# Altium PCB Eurocard VME 3U (3.937 x 8.660 inches).PCBDOC (part 2 of 2)
Units mm, origin at the board's own origin, x right, y up, seen from the top; angles counter-clockwise.
Board outline 219.96 x 100 mm, 2 copper layers (Component Side, Bottom Layer), stack 0.325 mm thick; 72 components, 87 nets, 462 pads, 228 vias.
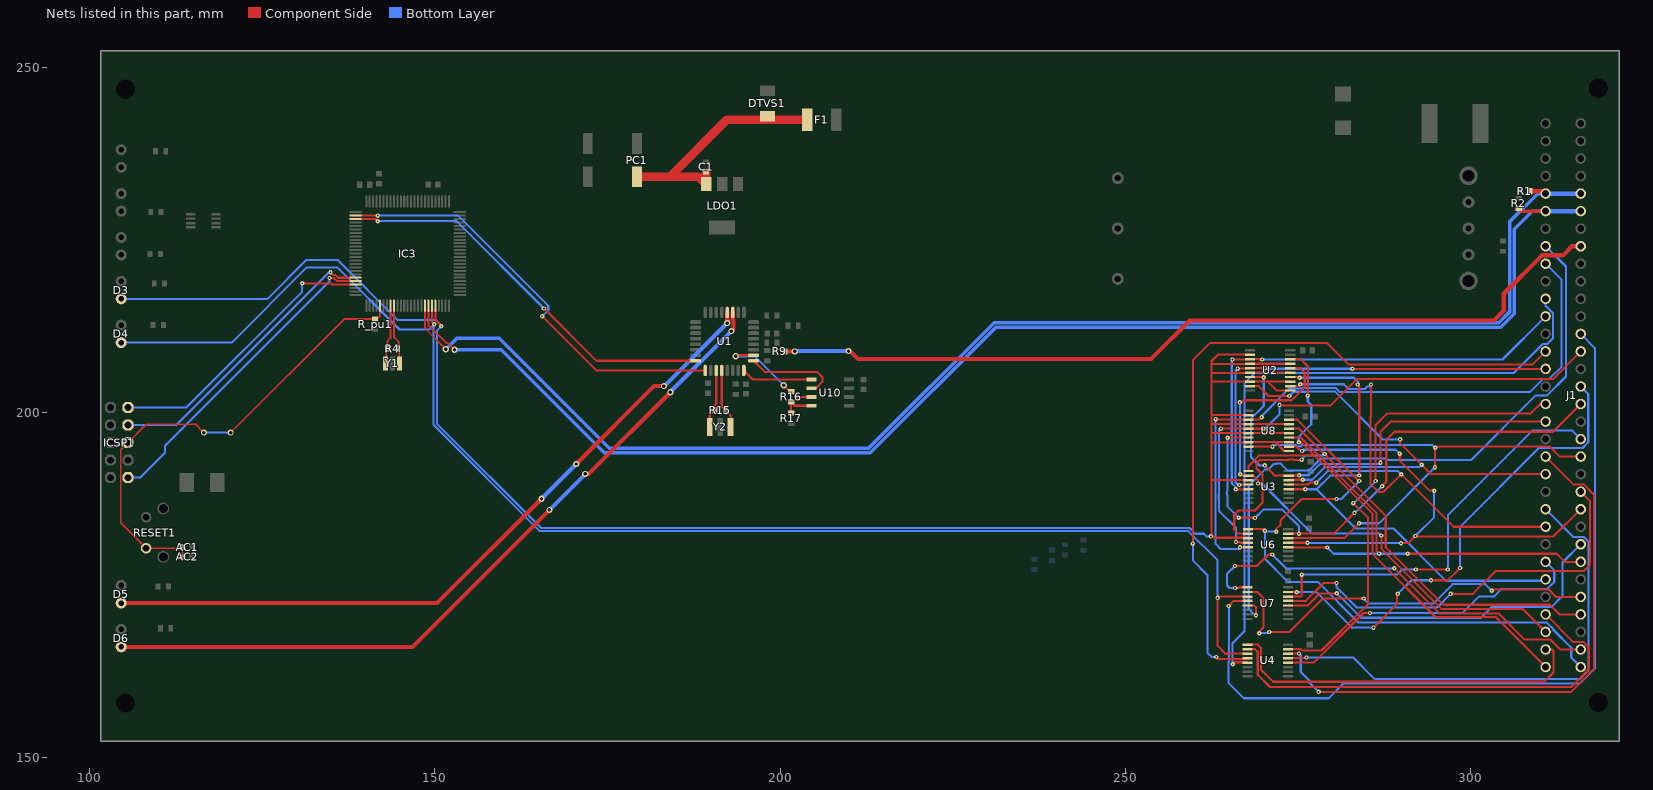
[diagram p2: the nets of this part, all layers, seen from the top]

## Via types
v1: diameter 0.635, hole 0.254, Component Side to Bottom Layer, 154 vias
v2: diameter 0.9, hole 0.5, Component Side to Bottom Layer, 48 vias
v3: diameter 1.016, hole 0.457, Component Side to Bottom Layer, 10 vias
v4: diameter 0.914/0.914 (per signal layer), hole 0.406, Component Side to Bottom Layer, 10 vias
v5: diameter 1.778, hole 0.9, Component Side to Bottom Layer, 3 vias
v6: diameter 1.27, hole 0.711, Component Side to Bottom Layer, 2 vias
v7: diameter 1.27, hole 0.635, Component Side to Bottom Layer, 1 vias

## Nets (pads, with @x,y where several pads share a name; then routed paths per layer and width w, separated by ;. In a path a pad name is that pad's centre, name@x,y a point inside that pad or via, vN(x,y) a via of type N, cw(c..) or ccw(c..) an arc to the next point about the centre after c; other vN are vias at no path point) (continued)
NetR15_1: R15.1 U1.28 Y2.3 | length 8.7
  Component Side w0.305: U1.28@191.548,206.087 191.548,200.845 R15.1@192.063,200.33 192.813,199.58 Y2.3@192.813,197.891
NetR15_2: R15.2 U1.27 Y2.1 | length 8.6
  Component Side w0.305: Y2.1@189.813,197.891 189.813,199.58 R15.2@190.563,200.33 190.563,201.078 190.748,201.263 U1.27@190.748,206.087
NetR16_1: R16.1 R17.2 U10.4 | length 4.7
  Component Side w0.305: R17.2@201.6,199.911 201.6,201.485 202.12,200.965 U10.4@204.546,200.965
NetR16_2: R16.2 U1.2 U10.3 | length 15.9
  Component Side w0.305: v2(193.573,208.128) 193.732,208.287 U1.2@196.148,208.287 ; v2(200.533,203.937) R16.2@201.459,203.01 ; R16.2@201.625,203.01 202.401,202.235 U10.3@204.546,202.235
  Bottom Layer w0.305: v2(193.573,208.128) 196.342,208.128 v2(200.533,203.937)
NetU1_1: U1.1 U10.2 | length 13.6
  Component Side w0.305: U1.1@196.148,207.487 197.767,205.867 205.384,205.867 206.121,205.13 206.121,204.419 205.207,203.505 U10.2@204.546,203.505
NetU1_32: U1.32 U10.1 | length 10.3
  Component Side w0.305: U1.32@194.748,206.087 196.06,204.775 U10.1@204.546,204.775
PB1: IC3.20 ICSP1.7 | length 41.9
  Component Side w0.305: v1@134.925,220.243 135.232,219.936 135.545,219.936 135.969,219.512 IC3.20@138.05,219.512
  Bottom Layer w0.305: ICSP1.7@105.537,198.171 112.534,198.171 134.658,220.294 v1(134.874,220.294)
PB2: IC3.21 ICSP1.1 | length 45.6
  Component Side w0.305: v1(134.722,219.481) 135.357,219.481 135.826,219.012 IC3.21@138.05,219.012
  Bottom Layer w0.305: ICSP1.1@105.537,190.551 107.264,190.551 110.896,194.183 110.896,195.199 134.722,219.024 v1(134.722,219.481)
PB3: IC3.22 ICSP1.9 | length 40.8
  Component Side w0.305: v1(130.759,218.694) 134.976,218.694 135.158,218.512 IC3.22@138.05,218.512
  Bottom Layer w0.305: ICSP1.9@105.537,200.711 113.995,200.711 130.759,217.475 v1(130.759,218.694)
PE0: IC3.2 U1.25 | length 62.5
  Component Side w0.305: IC3.2@138.05,228.512 v1(141.72,228.512) ; v1(165.519,213.919) 173.352,206.087 U1.25@189.148,206.087
  Bottom Layer w0.305: v1(141.72,228.512) 153.351,228.512 166.406,215.458 166.406,214.805 v1(165.519,213.919)
PE1: IC3.3 U1.24 | length 58.2
  Component Side w0.305: IC3.3@138.05,228.012 141.344,228.012 141.464,227.892 141.482,227.892 141.663,227.711 v1(141.707,227.711) ; v1(165.786,215.062) 165.811,215.062 173.386,207.487 U1.24@187.748,207.487
  Bottom Layer w0.305: v1(141.707,227.711) 153.137,227.711 v1(165.786,215.062)
RESET: AC1.1 AC2.1 IC3.30 ICSP1.5 R_pu1.1 RESET1.2 | length 69.5
  Component Side w0.254: AC1.1@113.28,180.325 RESET1.2@108.153,180.325 104.473,184.005 104.473,194.566 ICSP1.5@105.537,195.631 108.179,198.272 115.341,198.272 v2(116.532,197.082) ; AC2.1@113.448,179.248 AC1.1@113.448,180.492 ; v2@120.599,197.282 136.843,213.526 R_pu1.1@141.326,213.526 141.439,213.639 141.732,213.639 142.05,213.957 IC3.30@142.05,215.012
  Bottom Layer w0.254: v2(116.532,197.082) v2(120.399,197.082)
RX0: D6.1 U1.11 | length 110.3
  Component Side w0.61: D6.1@104.546,166.04 146.736,166.04 v2(166.573,185.877) ; v2(171.78,191.084) 172.263,191.084 v2(184.099,202.921) ; v2(192.938,211.785) 193.253,212.099 193.253,213.322 193.148,213.427 U1.11@193.148,214.487
  Bottom Layer w0.61: v2(166.573,185.877) v2(171.78,191.084) ; v2@184,202.847 v2(192.938,211.785)
RX1: D4.1 IC3.45 U4.3 U7.3 | length 214.1
  Component Side w0.305: IC3.45@149.55,215.012 149.55,213.111 v1@149.911,212.75 ; U4.3@267.716,165.049 267.706,165.059 264.919,165.059 264.909,165.049 264.516,165.049 263.373,166.192 v1(263.373,173.126) 263.576,173.33 U7.3@267.716,173.33
  Bottom Layer w0.305: D4.1@104.546,210.109 120.548,210.109 131.445,221.005 135.865,221.005 144.856,212.014 149.149,212.014 v1@149.812,212.677 ; v1(149.885,212.75) v1@149.812,212.677 ; v1(263.373,173.126) 263.373,178.562 259.131,182.804 165.193,182.804 149.812,198.186 v1@149.812,212.677
RXA1: J1.62 U4.1 | length 53.3
  Component Side w0.305: U4.1@267.716,166.37 269.189,166.37 269.646,165.913 269.646,162.763 271.424,160.985 310.693,160.985 312.039,162.331 312.039,165.43 311.81,165.659 J1.62@310.896,165.659
RXA2: J1.60 U4.2 | length 66.1
  Component Side w0.305: U4.2@267.716,165.71 268.783,165.71 269.192,165.301 269.192,161.999 270.967,160.223 314.586,160.223 317.17,162.807 317.17,165.97 316.417,166.723 314.912,166.723 J1.60@310.896,170.739
RXA3: J1.57 U4.12 | length 46.9
  Component Side w0.305: U4.12@273.558,163.754 277.317,163.754 284.505,170.942 v1(285.445,170.942)
  Bottom Layer w0.305: v1(285.445,170.942) 298.806,170.942 298.831,170.917 301.269,173.355 303.454,173.355 304.546,174.447 311.15,174.447 312.141,175.438 312.141,177.114 J1.57@310.896,178.359
RXA4: J1.54 U4.13 | length 72.2
  Component Side w0.305: U4.13@273.558,164.414 276.174,164.414 v1(276.25,164.49)
  Bottom Layer w0.305: v1(276.25,164.49) 283.032,164.49 286.156,161.366 315.849,161.366 317.119,162.636 317.119,181.261 316.417,181.963 314.912,181.963 J1.54@310.896,185.979
RXA5: J1.51 U4.14 | length 84.2
  Component Side w0.305: U4.14@273.558,165.049 273.583,165.075 v1(275.158,165.075) ; v1(278.003,159.512) 314.579,159.512 317.881,162.814 317.881,188.119 316.417,189.583 314.912,189.583 J1.51@310.896,193.599
  Bottom Layer w0.305: v1(275.158,165.075) 275.412,164.821 275.412,162.408 276.682,161.138 276.682,160.833 v1(278.003,159.512)
RXA6: J1.48 U4.15 | length 68.6
  Component Side w0.305: U4.15@273.558,165.71 275.438,165.71 275.641,165.506 278.427,165.506 284.317,171.397 284.376,171.397 285.166,172.187 285.166,172.783 285.176,172.793 285.176,184.724 v1(283.032,186.868) ; v1(286.258,190.068) 286.258,198.196 286.271,198.183 287.96,199.873 308.762,199.873 310.109,201.219 J1.48@310.896,201.219
  Bottom Layer w0.305: v1(283.032,186.868) 283.108,186.868 v1@286.283,190.043
RXA7: J1.45 U4.4 | length 103.7
  Component Side w0.305: v1(259.791,181) 259.791,207.543 262.329,210.081 279.199,210.081 282.321,206.959 309.016,206.959 J1.45@310.896,208.839 ; v1(263.171,164.569) 263.453,164.287 267.538,164.287 267.691,164.44 U4.4@267.716,164.414
  Bottom Layer w0.305: v1(259.791,181) 259.791,178.562 261.899,176.454 261.899,165.176 262.507,164.569 v1(263.171,164.569)
RXA8: J1.42 U4.5 | length 97.3
  Component Side w0.305: v1(265.557,163.525) 265.836,163.805 267.665,163.805 U4.5@267.716,163.754
  Bottom Layer w0.305: v1(265.557,163.525) 265.557,166.599 267.269,168.311 267.269,191.29 267.259,191.3 267.259,204.241 268.717,205.699 270.31,205.699 270.32,205.689 306.241,205.689 310.455,209.903 311.122,209.903 311.96,210.741 311.96,214.36 310.896,215.424 J1.42@310.896,216.459
RXB1: J1.30 U7.1 | length 63
  Component Side w0.305: v1(265.887,177.749) 269.062,177.749 270.739,179.426 v1(271.297,179.426) ; v1(265.913,174.574) 266.421,174.574 266.522,174.676 267.691,174.676 U7.1@267.716,174.65 ; v1(288.95,177.444) 295.504,170.891 304.063,170.891 307.82,167.134 311.529,167.134 313.004,165.659 J1.30@315.976,165.659
  Bottom Layer w0.305: v1(265.887,177.749) 264.744,176.606 264.744,174.93 265.1,174.574 v1(265.913,174.574) ; v1(271.297,179.426) 273.327,177.396 288.902,177.396 v1(288.95,177.444)
RXB2: J1.27 U7.2 | length 59
  Component Side w0.305: U7.2@267.716,173.99 269.113,173.99 270.027,173.076 270.027,168.88 269.392,168.245 v1(269.392,168.021) ; v1(270.866,168.199) 273.736,168.199 278.587,173.05 v1(284.556,173.05) ; v1(303.073,174.168) 303.251,174.346 310.453,174.346 310.455,174.343 311.337,174.343 312.401,173.279 J1.27@315.976,173.279
  Bottom Layer w0.305: v1(269.392,168.021) 270.688,168.021 v1(270.866,168.199) ; v1@284.556,172.999 285.217,172.339 294.665,172.339 297.444,175.118 302.123,175.118 v1(303.073,174.168)
RXB3: J1.24 U7.12 | length 51.8
  Component Side w0.305: U7.12@273.558,172.034 276.454,172.034 278.206,173.787 v1(280.645,173.787)
  Bottom Layer w0.305: v1(280.645,173.787) 284.175,170.256 301.523,170.256 303.124,171.856 311.76,171.856 313.334,173.431 313.334,178.257 J1.24@315.976,180.899
RXB4: J1.21 U7.13 | length 60.4
  Component Side w0.305: U7.13@273.558,172.695 276.149,172.695 278.74,175.285 v1(280.594,175.285) ; v1(297.129,173.711) 300.355,173.711 303.682,177.038 316.433,177.038 317.348,177.952 317.348,187.147 J1.21@315.976,188.519
  Bottom Layer w0.305: v1(280.594,175.285) 280.594,174.701 280.888,174.407 280.901,174.407 281.264,174.044 281.264,174.031 283.566,171.729 295.148,171.729 v1(297.129,173.711)
RXB5: J1.18 U7.14 | length 59.2
  Component Side w0.305: U7.14@273.558,173.33 275.387,173.33 275.565,173.507 v1(275.565,176.505) ; v1(292.075,177.241) v1(296.723,177.241)
  Bottom Layer w0.305: v1(275.565,176.505) 289.382,176.505 290.119,177.241 v1(292.075,177.241) ; v1(296.723,177.241) 296.723,185.115 308.966,197.358 314.757,197.358 J1.18@315.976,196.139
RXB6: J1.15 U7.15 | length 69.5
  Component Side w0.305: U7.15@273.558,173.99 273.583,173.965 v1(274.828,173.965) ; v1(285.953,168.834) 289.382,172.263 v1@289.382,173.685 ; v1(294.284,175.692) 296.723,175.692 v1(298.501,177.47)
  Bottom Layer w0.305: v1(274.828,173.965) 277.724,173.965 282.88,168.808 282.905,168.834 v1(285.953,168.834) ; v1(289.484,173.711) 291.465,175.692 v1(294.284,175.692) ; v1(298.501,177.47) 298.501,183.439 309.905,194.843 316.23,194.843 317.068,195.682 317.068,202.667 J1.15@315.976,203.759
RXB7: J1.12 U7.4 | length 119.3
  Component Side w0.305: v1(264.998,171.958) 265.735,172.695 U7.4@267.716,172.695
  Bottom Layer w0.305: v1(264.998,171.958) 264.998,163.843 264.937,163.782 264.937,160.843 267.183,158.598 279.451,158.598 281.584,160.731 315.849,160.731 316.029,160.911 316.037,160.911 318.033,162.907 318.033,209.321 J1.12@315.976,211.379
RXB8: J1.39 U7.5 | length 95.3
  Component Side w0.305: U7.5@267.716,172.034 267.741,172.009 268.732,172.009 268.935,171.806 v1(268.935,170.612)
  Bottom Layer w0.305: v1@268.783,170.612 267.894,171.501 267.894,189.382 270.22,191.709 270.703,191.709 271.541,192.547 271.843,192.547 271.876,192.58 272.547,192.58 273.559,191.569 276.6,191.569 278.353,193.322 278.877,193.322 278.9,193.345 287.693,193.345 287.922,193.116 300.126,193.116 309.474,202.463 311.106,202.463 313.842,205.2 313.842,221.132 J1.39@310.896,224.079
SCL: IC3.43 J1.4 J1.36 R1.2 | length 204.3
  Component Side w0.254: IC3.43@148.55,215.012 148.55,212.155 v2(151.562,209.144)
  Component Side w0.635: R1.2@308.768,231.883 308.635,232.016 310.579,232.016 J1.36@310.896,231.699
  Bottom Layer w0.508: v2(151.562,209.144) 153.187,210.769 159.309,210.769 175.26,194.818 212.81,194.818 230.994,213.002 304.121,213.002 305.666,214.547 305.666,227.6 309.765,231.699 J1.36@310.896,231.699
  Bottom Layer w0.635: J1.36@310.896,231.699 J1.4@315.976,231.699
SDA: IC3.44 J1.5 J1.37 R2.2 | length 202.7
  Component Side w0.254: IC3.44@149.05,215.012 149.05,212.646 151.689,210.007 151.917,210.007 v2(152.832,209.093)
  Component Side w0.508: R2.2@306.984,229.526 307.352,229.159 J1.37@310.896,229.159
  Bottom Layer w0.508: v2(152.832,209.093) 159.614,209.093 174.549,194.158 213.081,194.158 231.267,212.344 304.394,212.344 306.324,214.274 306.324,226.543 308.94,229.159 J1.37@310.896,229.159
  Bottom Layer w0.635: J1.37@310.896,229.159 J1.5@315.976,229.159
TX0: D5.1 U1.12 | length 106.1
  Component Side w0.61: D5.1@104.546,172.39 150.317,172.39 v2(165.43,187.503) ; v2(170.459,192.532) 181.737,203.81 v2(183.159,203.81) ; v2(192.348,212.947) U1.12@192.348,214.487
  Bottom Layer w0.61: v2(165.43,187.503) v2(170.459,192.532) ; v2@183.236,203.835 v2(192.348,212.947)
TX1: D3.1 IC3.46 U2.2 U2.4 U2.6 U2.8 U2.11 U2.13 U2.15 U2.17 U3.3 U6.3 U8.2 U8.4 U8.6 U8.8 U8.11 U8.13 U8.15 U8.17 | length 310.6
  Component Side w0.305: IC3.46@150.05,215.012 150.05,213.462 150.927,212.586 v1(150.927,212.496) ; v1(262.407,182.042) 262.733,182.042 262.926,181.849 267.706,181.849 U6.3@267.767,181.788 ; v1@262.484,182.042 262.484,190.195 ; 262.534,207.061 262.595,207 267.985,207 U2.4@268.046,207.061 268.056,207.051 273.878,207.051 U2.17@273.888,207.061 ; 262.585,197.002 U8.15@273.812,197.002 ; 262.585,198.298 U8.17@273.812,198.298 ; 262.585,205.765 262.621,205.73 268.011,205.73 U2.6@268.046,205.765 U2.15@273.888,205.765 ; 262.611,195.707 262.646,195.671 267.934,195.671 267.97,195.707 U8.13@273.812,195.707 ; 262.611,204.47 U2.8@268.046,204.47 268.056,204.46 270.627,204.46 270.637,204.47 ; 262.661,199.619 262.697,199.654 267.934,199.654 U8.2@267.97,199.619 ; U3.3@267.843,190.195 262.484,190.195 ; U2.2@268.046,208.382 263.423,208.382 262.484,207.442 262.484,190.195 ; 271.704,195.707 272.999,194.412 U8.11@273.812,194.412 ; U2.11@273.888,203.175 271.932,203.175 270.637,204.47 ; U2.13@273.888,204.47 270.637,204.47
  Bottom Layer w0.305: D3.1@104.546,216.459 125.755,216.459 131.394,222.098 135.89,222.098 144.617,213.37 150.142,213.37 150.927,212.586 v1(150.927,212.496) 150.266,211.836 150.266,198.374 165.382,183.259 259.319,183.259 260.155,182.423 261.366,182.423 261.747,182.042 v1(262.407,182.042)
TXA1: J1.63 U2.18 U3.1 | length 78.6
  Component Side w0.305: U3.1@267.843,191.516 267.843,192.227 269.403,193.787 277.383,193.787 ; U2.18@273.888,207.721 275.412,207.721 276.479,206.654 276.479,202.489 v1(276.428,202.438) ; v1(275.133,195.682) 275.488,195.682 277.383,193.787 ; J1.63@310.896,163.119 303.657,170.358 294.945,170.358 285.801,179.502 285.801,185.369 277.383,193.787
  Bottom Layer w0.305: v1(275.133,195.682) 275.133,196.469 276.936,198.272 276.936,201.066 276.428,201.574 v1(276.428,202.438)
TXA2: J1.61 U2.16 U3.2 | length 80.3
  Component Side w0.305: v1(266.598,201.447) 266.827,201.447 267.147,201.767 274.107,201.767 275.996,203.657 275.996,205.791 275.361,206.426 U2.16@273.888,206.426 ; v1(266.649,191.033) 266.649,190.856 U3.2@267.843,190.856 267.894,190.805 267.919,190.83 268.55,190.83 269.24,190.14 v1(269.24,189.713) ; v1(287.096,182.169) 287.096,180.238 295.783,171.552 307.543,171.552 J1.61@310.896,168.199
  Bottom Layer w0.305: v1@266.598,191.16 v1(266.598,201.447) ; v1(269.24,189.713) 269.799,189.713 277.063,182.448 286.817,182.448 v1(287.096,182.169)
TXA3: J1.58 U2.14 U3.12 | length 73.5
  Component Side w0.305: U3.12@273.71,188.874 v1(276.098,188.874) ; U2.14@273.888,205.13 v1@275.158,205.13 ; v1(283.693,204.038) 283.718,204.013 283.667,203.962 283.896,203.733 v1(283.896,190.856)
  Bottom Layer w0.305: v1(275.26,205.029) 283.108,205.029 283.693,204.445 v1(283.693,204.038) ; v1(276.098,188.874) 277.698,188.874 ; v1(283.896,190.856) 279.654,190.856 279.667,190.843 277.698,188.874 ; J1.58@310.896,175.819 310.693,175.616 296.443,175.616 288.874,183.185 283.388,183.185 277.698,188.874
TXA4: J1.55 U2.12 U3.13 | length 73.9
  Component Side w0.305: U3.13@273.685,189.56 276.479,189.56 276.758,189.84 v1(277.673,189.84) ; U2.12@273.888,203.81 v1@275.234,203.81 ; v1(285.598,204.038) 285.598,199.365 285.547,199.314 285.547,189.611 286.664,188.493 287.401,188.493 v1(289.966,191.059) 297.586,183.439 J1.55@310.896,183.439
  Bottom Layer w0.305: v1(275.336,204.089) 281.661,204.089 282.331,203.418 284.724,203.418 285.087,203.781 285.341,203.781 v1(285.598,204.038) ; v1(277.673,189.84) 279.324,191.491 289.535,191.491 v1(289.966,191.059)
TXA5: J1.52 U2.9 U3.14 | length 69.2
  Component Side w0.305: U2.9@268.046,203.81 269.316,203.81 270.739,202.387 v1(273.761,202.387) ; U3.14@273.685,190.195 273.736,190.246 v1(275.717,190.246) ; v1(289.814,196.088) 289.814,195.529 v1(292.938,192.405) 294.284,191.059 J1.52@310.896,191.059
  Bottom Layer w0.305: v1(273.761,202.387) 274.371,202.997 276.11,202.997 276.171,203.058 280.33,203.058 287.299,196.088 v1(289.814,196.088) ; v1(275.717,190.246) 277.063,190.246 278.892,192.075 292.608,192.075 v1(292.938,192.405)
TXA6: J1.49 U2.7 U3.15 | length 63.8
  Component Side w0.305: U2.7@268.046,205.13 v1@269.85,205.13 ; v1(270.205,192.329) 271.678,190.856 U3.15@273.685,190.856 274.93,190.856 274.98,190.906 v1(275.184,190.906) ; v1(286.969,192.71) 286.969,197.18 288.468,198.679 J1.49@310.896,198.679
  Bottom Layer w0.305: v1(270.053,205.08) 270.053,200.939 268.199,199.085 268.199,193.548 269.443,192.303 269.469,192.329 v1(270.205,192.329) ; v1(275.184,190.906) 276.581,190.906 278.232,192.557 286.817,192.557 v1(286.969,192.71)
TXA7: J1.46 U2.5 U3.4 | length 62.8
  Component Side w0.305: v1(266.268,206.35) 267.97,206.35 U2.5@268.046,206.426 ; v1(266.497,189.484) 266.776,189.484 266.878,189.586 U3.4@267.818,189.586 ; U2.5@268.072,206.451 268.097,206.426 v1(270.231,206.426) ; v1@282.931,206.299 J1.46@310.896,206.299
  Bottom Layer w0.305: 266.141,189.662 265.963,189.84 265.963,206.045 v1(266.268,206.35) ; v1@270.332,206.324 v1(282.905,206.324)
TXA8: J1.43 U2.3 U3.5 | length 69
  Component Side w0.305: v1(265.532,207.67) U2.3@267.894,207.67 ; v1(266.014,188.849) U3.5@267.792,188.849 ; U2.3@268.046,207.721 268.072,207.747 269.291,207.747 269.367,207.67 v1(269.85,207.67)
  Bottom Layer w0.305: v1(265.532,207.67) 265.43,207.772 265.43,196.634 265.466,196.599 265.466,196.085 265.43,196.05 265.43,189.73 265.877,189.283 265.877,189.227 266.014,189.09 v1(266.014,188.849) ; v1(269.85,207.67) 304.648,207.67 J1.43@310.896,213.919
TXB1: J1.31 U6.1 U8.18 | length 91.1
  Component Side w0.305: U6.1@267.767,183.109 270.154,183.109 270.231,183.032 v1(270.231,182.855) ; v1(271.886,182.728) 271.886,183.125 272.501,183.741 272.501,184.254 272.499,184.257 272.499,184.412 275.539,187.452 v1(280.594,187.452) ; U8.18@273.812,198.958 274.917,198.958 283.639,190.236 283.728,190.236 v1(283.896,190.068)
  Bottom Layer w0.305: v1(271.886,182.728) 270.358,182.728 v1(270.231,182.855) 270.231,178.892 270.18,178.841 273.558,175.463 277.876,175.463 283.794,169.545 311.055,169.545 311.96,168.64 311.96,168.557 314.604,165.913 314.604,164.49 J1.31@315.976,163.119 ; v1@280.568,187.452 281.28,187.452 v1(283.896,190.068)
TXB2: J1.28 U6.2 U8.16 | length 81.7
  Component Side w0.305: U6.2@267.767,182.448 266.344,182.448 265.786,183.007 265.786,185.191 266.395,185.801 268.783,185.801 269.875,186.893 269.875,191.008 269.001,191.882 269.001,192.623 269.494,193.116 273.606,193.116 273.68,193.19 274.351,193.19 274.425,193.116 v1@275.488,193.116 ; U8.16@273.812,197.663 275.107,197.663 287.731,185.039 287.731,180.475 296.071,172.136 311.506,172.136 312.903,170.739 J1.28@315.976,170.739
  Bottom Layer w0.305: v1(275.539,193.167) 276.149,193.777 278.689,193.777 v1(278.892,193.98)
TXB3: J1.25 U6.12 U8.14 | length 66.4
  Component Side w0.305: U6.12@273.609,180.492 273.66,180.442 v1(279.273,180.442) ; U8.14@273.812,196.367 275.438,196.367 275.669,196.136 275.677,196.136 286.41,185.403 286.41,179.908 v1(286.766,179.553) ; v1(290.906,179.527) 312.395,179.527 312.445,179.578 313.665,178.359 J1.25@315.976,178.359
  Bottom Layer w0.305: v1(279.273,180.442) 280.187,179.527 v1(290.906,179.527)
TXB4: J1.22 U6.13 U8.12 | length 76.4
  Component Side w0.305: U6.13@273.634,181.127 v1(276.403,181.127) ; U8.12@273.812,195.047 274.777,195.047 275.412,194.412 v1(275.615,194.412) ; v1(289.763,194.005) 289.763,193.015 294.107,188.671 v1(294.742,188.671) ; v1(289.941,181.061) 290.993,181.061 291.973,182.042 312.039,182.042 J1.22@315.976,185.979
  Bottom Layer w0.305: v1(275.615,194.412) 275.803,194.6 289.169,194.6 v1(289.763,194.005) ; v1(276.403,181.127) 276.428,181.153 276.52,181.061 v1(289.941,181.061) ; v1(292.024,182.093) 294.742,184.81 v1(294.742,188.671)
TXB5: J1.19 U6.14 U8.9 | length 77.4
  Component Side w0.305: U8.9@267.995,195.021 268.021,195.047 v1(271.323,195.047) ; U6.14@273.609,181.788 281.711,181.788 v1(283.87,183.947) ; v1@294.894,192.075 v1(294.894,194.869) 295.1,195.074 311.452,195.074 312.928,193.599 J1.19@315.976,193.599
  Bottom Layer w0.305: v1(271.323,195.047) 271.551,195.275 274.663,195.275 274.876,195.062 275.39,195.062 275.603,195.275 294.488,195.275 v1(294.894,194.869) ; v1(283.87,183.947) 286.766,183.947 v1(294.869,192.049)
TXB6: J1.16 U6.15 U8.7 | length 80.2
  Component Side w0.305: v1(264.846,196.342) 267.843,196.342 267.894,196.291 U8.7@267.97,196.367 ; v1(266.421,184.76) v1@268.732,184.76 ; U6.15@273.609,182.448 280.213,182.448 v1(283.21,185.445) ; v1(287.198,189.306) 287.807,189.916 287.807,196.012 289.001,197.206 311.963,197.206 J1.16@315.976,201.219
  Bottom Layer w0.305: v1@264.82,196.113 264.82,188.633 264.759,188.572 264.759,188.059 264.82,187.998 264.82,186.36 v1(266.421,184.76) ; v1(268.783,184.709) 270.002,185.928 272.745,185.928 275.158,183.515 v1(275.158,182.423) ; v1(283.21,185.445) 283.337,185.445 v1(287.198,189.306)
TXB7: J1.13 U6.4 U8.5 | length 76.8
  Component Side w0.305: v1(263.855,197.663) U8.5@267.97,197.663 ; v1(266.04,181.229) 266.497,181.229 266.598,181.127 267.741,181.127 U6.4@267.767,181.153 ; U8.5@267.995,197.637 v1(270.053,197.637) ; v1(272.339,201.092) 272.438,200.993 279.682,200.993 283.512,204.823 311.963,204.823 311.963,204.826 J1.13@315.976,208.839
  Bottom Layer w0.305: v1(263.855,197.663) 263.55,197.358 263.55,188.024 263.54,188.014 263.54,187.5 263.55,187.49 263.55,185.776 266.04,183.286 v1(266.04,181.229) ; v1@270.256,197.663 272.339,199.746 v1(272.339,201.092)
TXB8: J1.40 U6.5 U8.3 | length 92.6
  Component Side w0.305: v1(263.119,199.034) 263.195,198.958 269.392,198.958 v1(269.748,199.314) ; v1(266.624,180.467) U6.5@267.741,180.467
  Bottom Layer w0.305: v1(263.119,199.034) 263.096,199.011 263.096,188.212 263.085,188.202 263.085,187.312 263.096,187.301 263.096,180.973 263.855,180.213 266.421,180.213 ; v1@269.773,199.314 269.773,199.492 273.761,203.479 275.069,203.479 275.079,203.469 275.593,203.469 275.636,203.513 280.518,203.513 281.085,202.946 308.578,202.946 310.455,204.823 311.337,204.823 311.369,204.791 313.207,206.629 313.207,219.227 J1.40@310.896,221.539
VIN: C1.2 DTVS1.1 F1.2 LDO1.3 PC1.+ | length 35.5
  Component Side w1.27: PC1.+@179.262,234.156 184.042,234.156 ; C1.2@189.292,234.848 LDO1.3@189.292,233.071 188.207,234.156 184.042,234.156 ; F1.2@203.919,242.392 192.278,242.392 184.042,234.156
XTAL1: IC3.34 R4.1 Y1.3 | length 8.2
  Component Side w0.254: IC3.34@144.05,215.012 144.05,210.94 144.71,210.281 144.71,209.257 144.713,209.237 144.821,208.638 Y1.3@144.821,207.098
XTAL2: IC3.33 R4.2 Y1.1 | length 9.1
  Component Side w0.254: Y1.1@142.821,206.574 Y1.1@142.821,206.701 ; Y1.1@142.821,207.098 Y1.1@142.821,206.701 ; R4.2@142.932,209.22 142.932,206.812 Y1.1@142.821,206.701 ; R4.2@143.116,209.22 143.116,210.349 143.55,210.784 IC3.33@143.55,215.012
XVCC: J1.7 R9.1 | length 123.9
  Component Side w0.61: R9.1@200.724,208.839 v2(202.108,208.839) ; v2(209.906,208.89) 210.134,208.89 211.275,207.749 253.748,207.749 259.334,213.335 303.403,213.335 304.825,214.757 304.825,217.189 310.392,222.756 313.383,222.756 314.706,224.079 J1.7@315.976,224.079
  Bottom Layer w0.61: v2(202.108,208.839) 202.159,208.89 v2(209.906,208.89)
pads on no net: IC3.1 IC3.4 IC3.5 IC3.6 IC3.7 IC3.8 IC3.9 IC3.12 IC3.13 IC3.14 IC3.15 IC3.16 IC3.17 IC3.18 IC3.19 IC3.23 IC3.24 IC3.25 IC3.26 IC3.27 IC3.28 IC3.29 IC3.38 IC3.47 IC3.48 IC3.49 IC3.50 IC3.51 IC3.52 IC3.53 IC3.54 IC3.55 IC3.56 IC3.57 IC3.58 IC3.59 IC3.60 IC3.63 IC3.64 IC3.65 IC3.66 IC3.67 IC3.68 IC3.69 IC3.70 IC3.71 IC3.72 IC3.73 IC3.74 IC3.75 IC3.76 IC3.77 IC3.78 IC3.79 IC3.82 IC3.83 IC3.84 IC3.85 IC3.86 IC3.87 IC3.88 IC3.89 IC3.90 IC3.91 IC3.92 IC3.93 IC3.94 IC3.95 IC3.96 IC3.97 ICSP1.3 J1.0@318.516,158.039 J1.0@318.516,246.939 P1.5 P1.7 RESET1.0 U1.10 U1.15 U1.16 U1.18 U1.19 U1.20 U1.23 U10.6 U10.7
copper on no net:
  other v2: 246.507,232.766 248.945,235.509

## Polygon pours and split planes (outlines as drawn)
+5V on Bottom Layer "Bottom-+5V" (solid, remove dead copper, pour order 132): 196.559,232.517 196.559,222.428 186.729,222.428 186.729,232.517
GND on Bottom Layer "GND_L02_P133" (solid, pour order 133): 101.6,152.4 321.564,152.4 321.564,252.4 101.6,252.4
9V on Bottom Layer "9V_L02_P131" (solid, pour order 131): 296.113,232.105 302.717,232.105 305.867,235.255 306.07,235.458 317.678,235.458 317.678,238.176 317.652,238.15 296.062,238.15
36V on Component Side "36V_L01_P128" (solid, pour order 128): 300.126,244.602 300.164,244.564 300.164,238.252 317.068,238.252 317.83,239.014 317.83,244.602
9V on Component Side "Component Side-No Net 2" (solid, pour order 126): 296.113,232.08 302.717,232.08 305.867,235.229 306.07,235.433 317.678,235.433 317.678,238.15 317.652,238.125 296.062,238.125
NetDTVS2_1 on Component Side "Component Side-No Net 2" (solid, pour order 129): 245.346,231.318 245.338,244.805 295.275,244.805 295.275,238.15 249.961,238.15 249.944,238.133 249.944,231.318
GND on Component Side "GND_L01_P130" (solid, pour order 130): 101.6,152.4 321.564,152.4 321.564,252.4 101.6,252.4
+5V on Component Side "Bottom-+5V" (solid, remove dead copper, pour order 127): 196.559,232.517 196.559,222.479 186.729,222.479 186.729,232.517

## Silkscreen, mask and mechanical layers (free items; w line width, h text height)
Top Overlay:
  circle w0.254: c105.156,246.812 r2.857
  circle w0.254: c105.156,157.912 r2.857
Mechanical1:
  the board outline again, w0.508
Mechanical 20:
  lines w0: 202.972,209.078 205.294,211.373

## Dimensions
105.156,151.892 to 101.6,152.4 on Mechanical4
101.092,157.912 to 101.6,152.4 on Mechanical4

## Text inside footprints (layer, text, board x,y; h text height)
LDO1: Top Overlay "2" at 192.883,234.248 h1.26 r180; Top Overlay "1" at 195.045,234.239 h1.26 r180; Top Overlay "4" at 189.687,227.381 h1.26 r180; Top Overlay "3" at 190.551,234.239 h1.26 r180
U9: Top Overlay "*" at 113.792,228.956 h1.97; Mechanical16 "*" at 113.792,228.956 h1.97
U10: Top Overlay "*" at 203.708,205.207 h1.97; Mechanical16 "*" at 203.708,205.207 h1.97